# Altium PCB SIM5320  RPi BB.PcbDoc
Units mm, origin at the board's own origin, x right, y up, seen from the top; angles counter-clockwise.
Board outline 65.91 x 59.94 mm, 2 copper layers (Top Layer, Bottom Layer); 30 components, 44 nets, 190 pads, 24 vias.
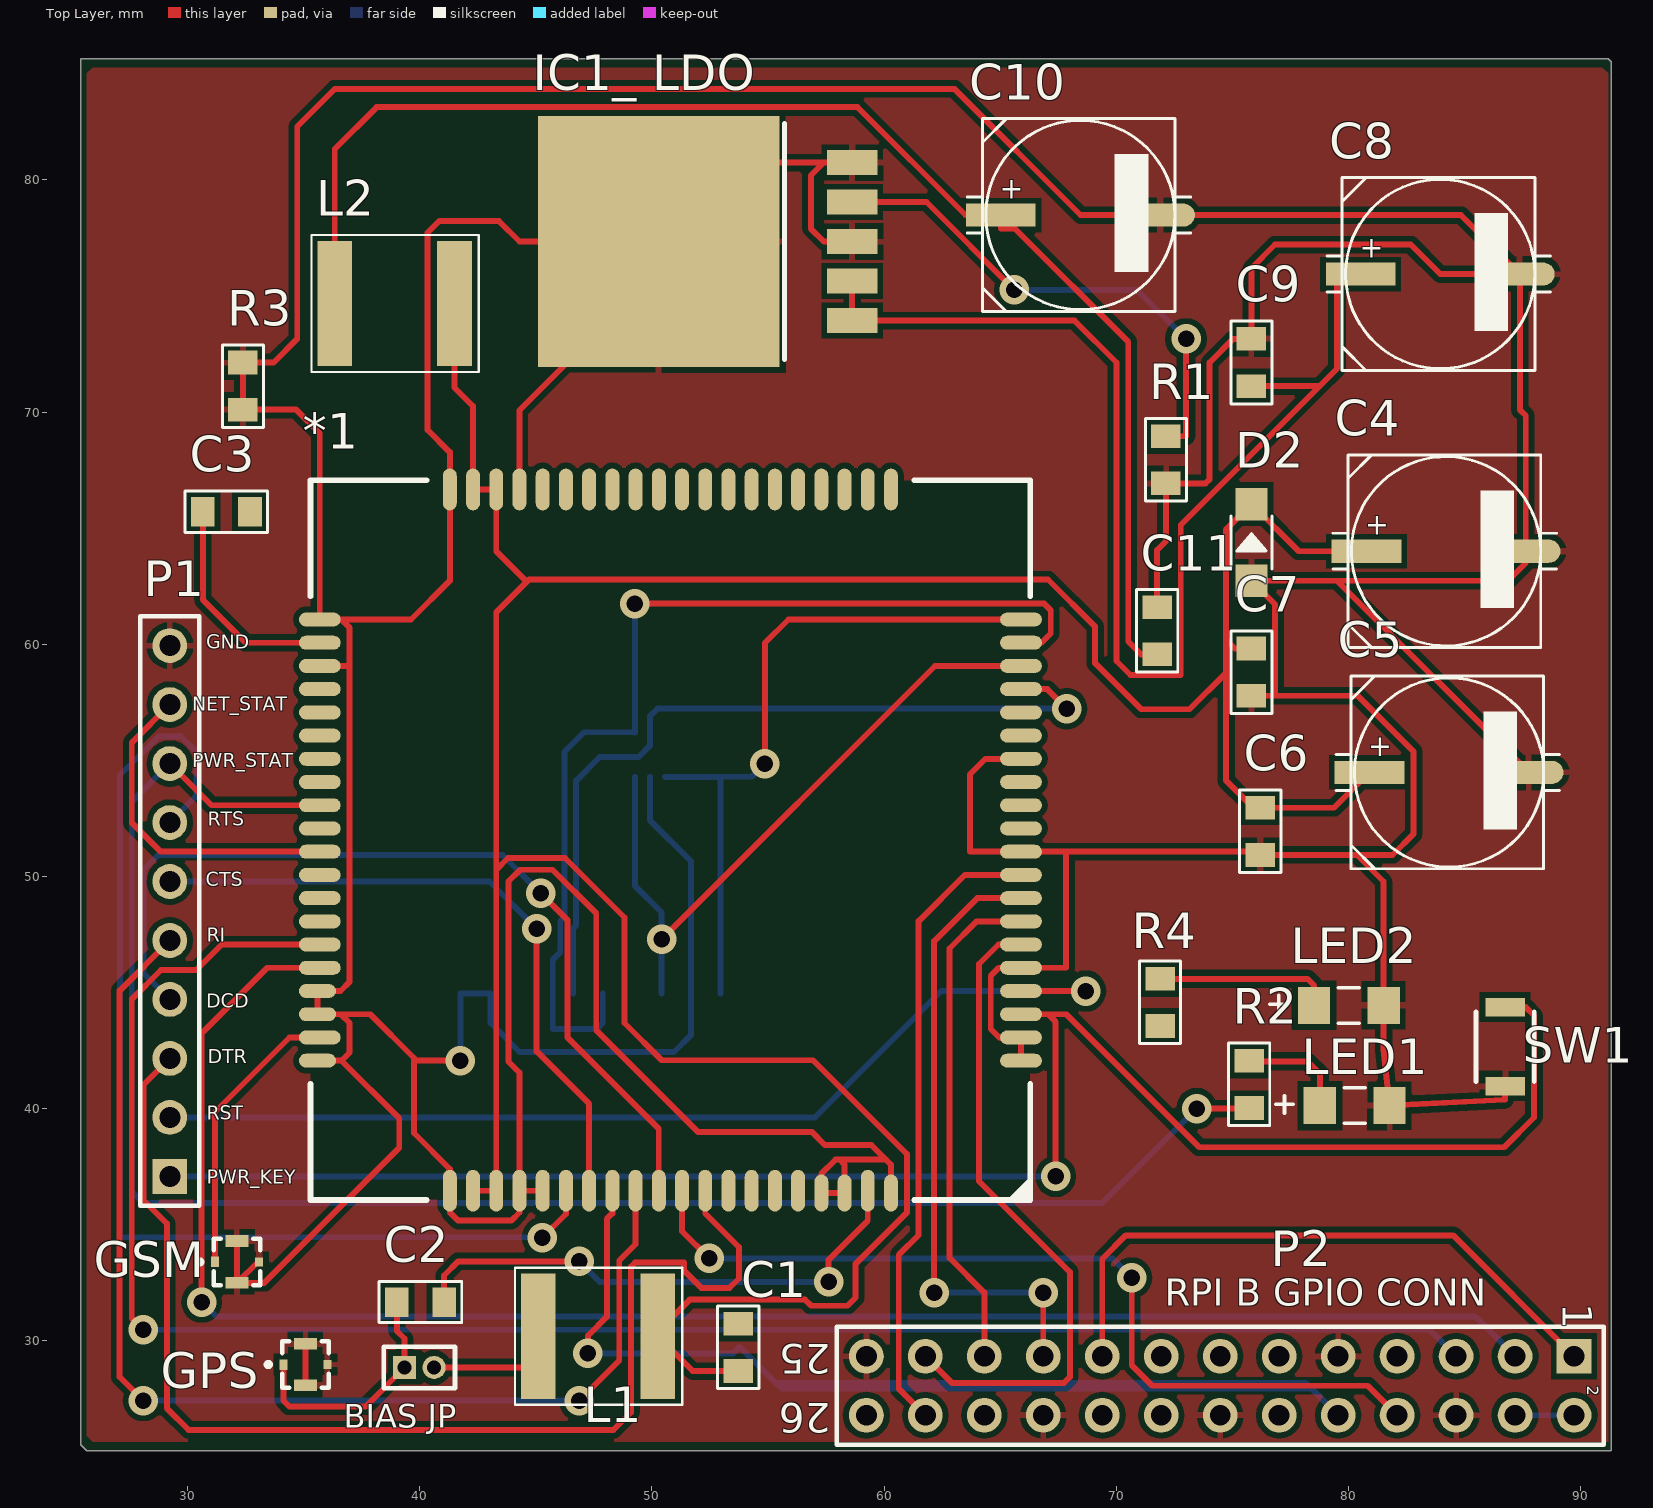
[diagram p0: Top Layer view]
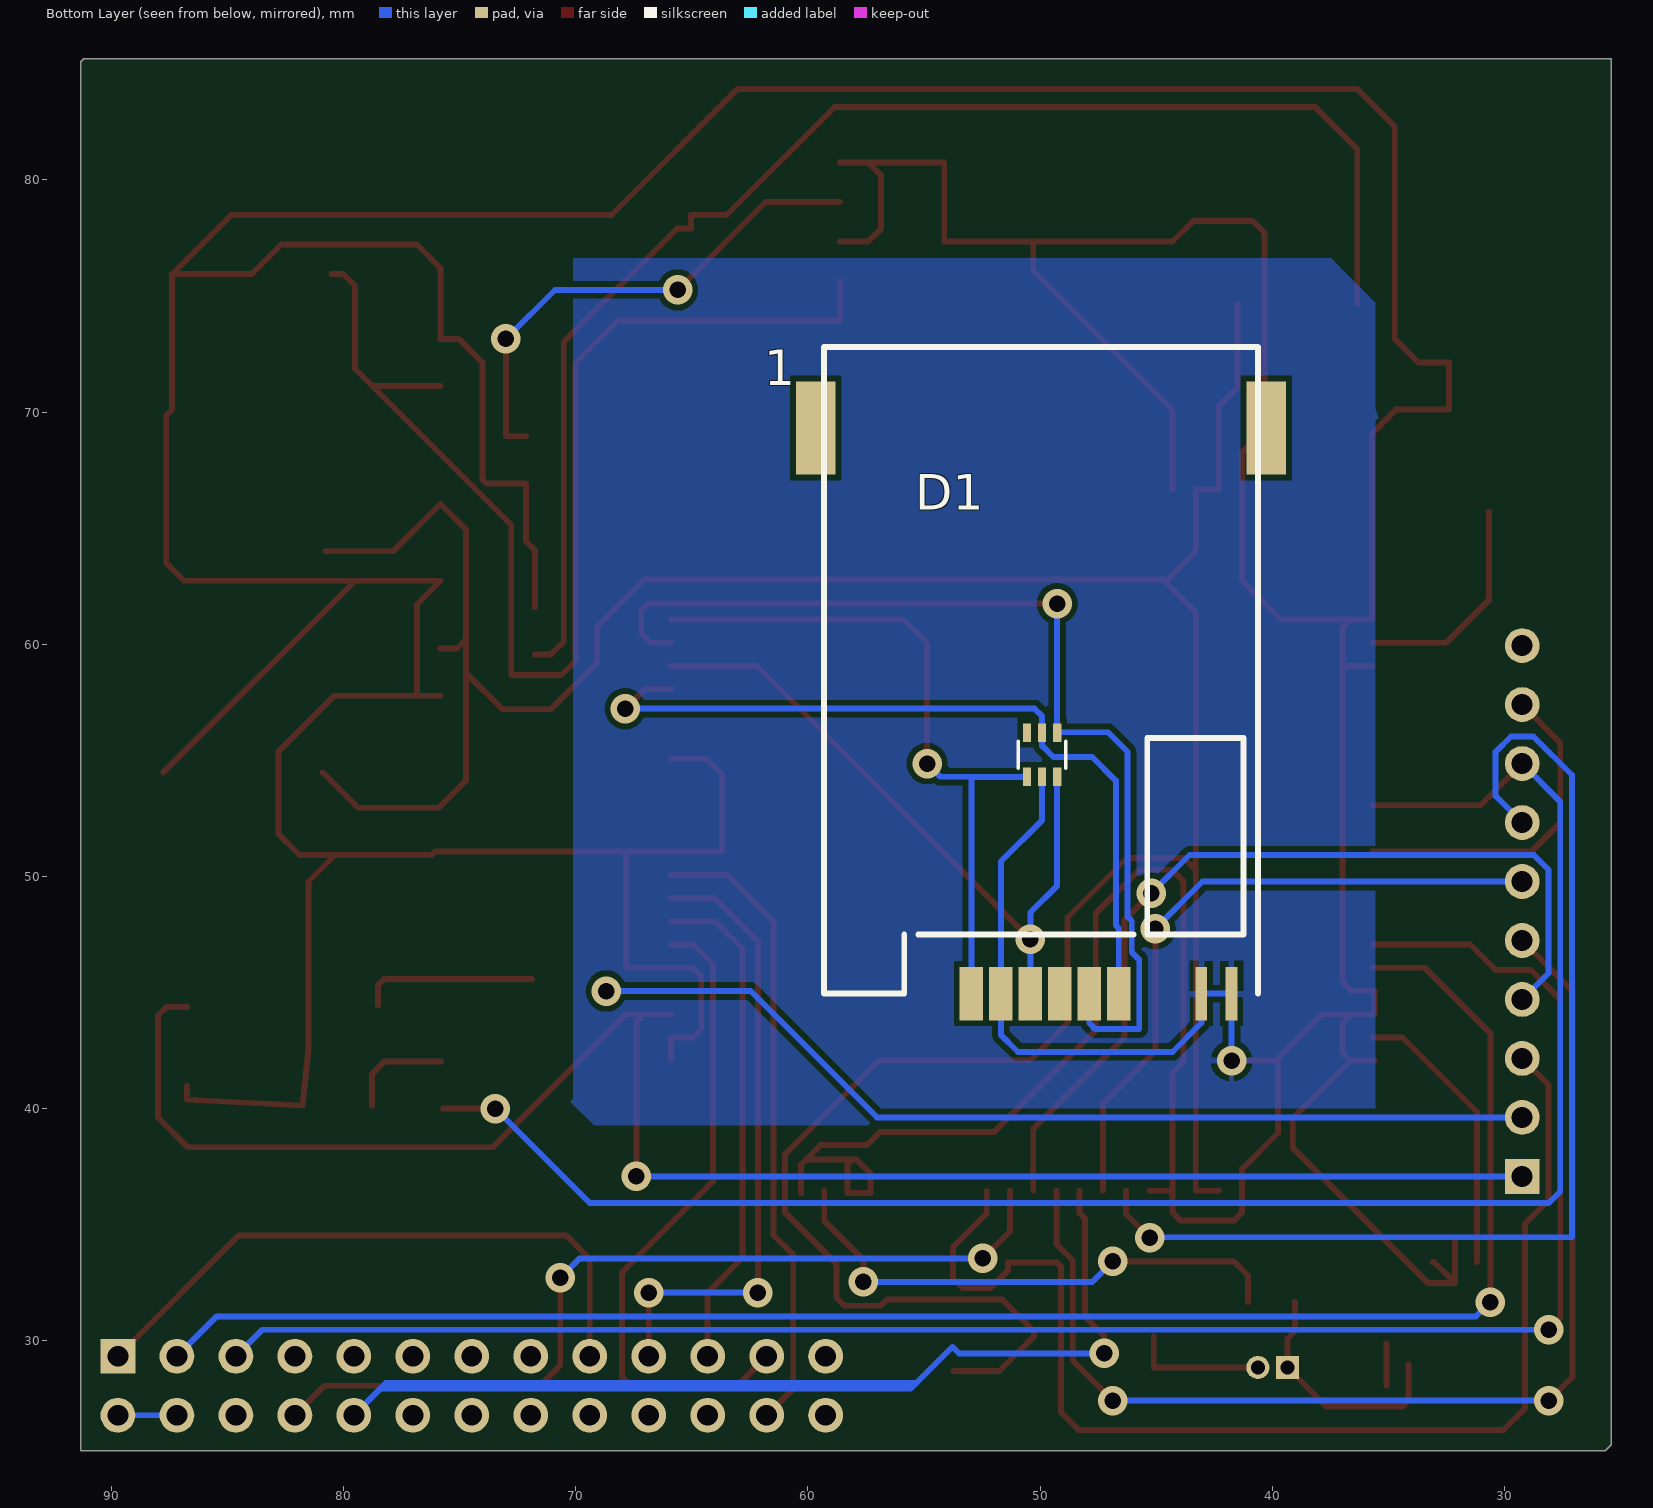
[diagram p1: Bottom Layer view, seen from below]

## Layer stack, top to bottom
Top Solder: solder mask 0.0102, Solder Resist, Dk 3.5
Top Layer: signal copper 0.0356
Dielectric 1: dielectric 0.32, FR-4, Dk 4.8
Bottom Layer: signal copper 0.0356
Bottom Solder: solder mask 0.0102, Solder Resist, Dk 3.5

## Board outline
25.4,85.217 91.186,85.217 91.313,85.09 91.313,25.273 25.654,25.273 25.527,25.4 25.4,25.527 25.4,85.09

## Design rules (kind name [scope] priority, off if disabled: settings)
Clearance [All] p1: gap=0.254
PolygonConnect [All] p1: connectstyle=Relief reliefconductorwidth=0.254 reliefentries=4 polygonreliefangle="90 Angle" airgapwidth=0.254
RoutingVias [All] p1: holewidth=0.711 width=1.27 viastyle="Through Hole" minholewidth=0.711 minwidth=1.27 maxholewidth=0.711 maxwidth=1.27
SolderMaskExpansion [All] p1: expansion=0.102
Width [All] p1: maxlimit=0.254 minlimit=0.254 preferedwidth=0.254
30 further rules are at their usual default settings.

## Components (designator, comment, footprint, x,y, rotation, side; value= is the part's Value field where it differs from the comment)
1 "10103594-0001LF" POS-5 49.784,44.958 r0 bottom
*1 "SIM5320" SIM5320 66.294,36.068 r180 top
"BIAS JP" "MHDR1X2" MHDR1X2 39.345,28.854 r0 top
C1 "33pF" 0805C-TBD 53.721,28.956 r90 top
C2 "33pF" 0805C-TBD 39.268,31.674 r0 top
C3 "10uF" 0805C-GENERIC 30.912,65.71 r0 top
C4 "100uF" PANACAP-e-GENERIC 84.201,64.008 r0 top
C5 "100uF" PANACAP-e-GENERIC 84.328,54.483 r0 top
C6 "33pF" 0805C-TBD 76.2,52.705 r270 top
C7 "TBD" 0805C-TBD 75.819,59.563 r270 top
C8 "100uF" PANACAP-e-GENERIC 83.947,75.946 r0 top
C9 "1uF" 0805C-TBD 75.819,71.374 r90 top
C10 "330uF" PANACAP-e-GENERIC 68.453,78.486 r0 top
C11 "100nF" 0805C-TBD 71.755,59.817 r90 top
D1 "SMF05C" SC70-6 49.911,55.245 r180 bottom
D2 "SMD-DIODE-ZENER-15V-500MW(SOD-123)" SOD-123_SMD-DIODE-ZENER-15V-500MW(SOD-123)(Primary) 75.819,64.389 r90 top
GPS "MM8030-2610RJ3" MURATA_MM8030-2610RJ3 35.077,28.981 r0 top
GSM "MM8030-2610RJ3" MURATA_MM8030-2610RJ3 32.131,33.401 r0 top
"IC1_ LDO" "MIC29302WU" TO263-5 52.832,77.343 r90 top
L1 "33nH" 2220 47.752,30.201 r0 top
L2 "220 Ohm" 2220 38.989,74.676 r0 top
LED1 "597-3311-402F" LED_597-3311-402F 80.264,40.132 r180 top
LED2 "597-3311-402F" LED_597-3311-402F 80.01,44.45 r180 top
P1 "Header 10" HDR1X10 29.235,37.084 r90 top (schematic designator P?)
P2 "Header 13X2" HDR2X13 89.713,29.337 r180 top
R1 "100" 0805R-TBD 72.136,68.707 r270 top
R2 "5 Ohm" 0805R-TBD 75.717,40.284 r90 top
R3 "60" 0805R-TBD 32.385,70.358 r90 top
R4 "5 Ohm" 0805R-TBD 71.882,43.815 r90 top
SW1 "B3U-3100P-B" B3U 86.741,42.672 r90 top

## Footprints (in the part's own frame and the unit in brackets; to place one, negate y for a bottom-side part, rotate by r counter-clockwise, add the part's x,y. Pads: shape width x height; smd on the part's side, far side on the other; paste and mask are expansions set on the pad)
0805C-GENERIC [mil] "CAPACITOR 0805"
  rect 40x50 smd: 1(-10,0) 2(70,0)
  silkscreen extent -40,-35 100,35, body extent -11,-25 70,25, height 26
0805C-TBD [mil] "CAPACITOR 0805"
  rect 40x50 smd: 1(-10,0) 2(70,0)
  silkscreen extent -40,-35 100,35, body extent -11,-25 70,25, height 26
0805R-TBD [mil] "RESISTOR 0805 VALUE TO BE DETERMINED"
  rect 40x50 smd: 1(-10,0) 2(70,0)
  silkscreen extent -40,-35 100,35, body extent -11,-25 70,25, height 27
2220 [mm]
  rect 1.5x5.4 smd paste-25.4 mask-25.4: 1(-2.65,0) 2(2.5,0)
  silkscreen extent -3.65,-2.95 3.55,2.95
B3U [mm]
  rect 0.8x1.7 smd paste-25.4 mask-25.4: 1(-1.7,0) 2(1.7,0)
  silkscreen extent -1.5,-1.25 1.5,1.25
HDR1X10 [mm] "Connector; Header; 10 Position"
  rect 1.5x1.5 hole 0.9: 1(0,0)
  round 1.5 hole 0.9: 2(2.54,0) 3(5.08,0) 4(7.62,0) 5(10.16,0) 6(12.7,0) 7(15.24,0) 8(17.78,0) 9(20.32,0) 10(22.86,0)
  silkscreen extent -1.27,-1.27 24.13,1.27
HDR2X13 [mm] "Connector; Header; 13x2 Position"
  rect 1.5x1.5 hole 0.9: 1(0,0)
  round 1.5 hole 0.9: 2(0,2.54) 3(2.54,0) 4(2.54,2.54) 5(5.08,0) 6(5.08,2.54) 7(7.62,0) 8(7.62,2.54) 9(10.16,0) 10(10.16,2.54) 11(12.7,0) 12(12.7,2.54) 13(15.24,0) 14(15.24,2.54) 15(17.78,0) 16(17.78,2.54) 17(20.32,0) 18(20.32,2.54) 19(22.86,0) 20(22.86,2.54) 21(25.4,0) 22(25.4,2.54) 23(27.94,0) 24(27.94,2.54) 25(30.48,0) 26(30.48,2.54)
  silkscreen extent -1.27,-1.27 31.75,3.81
LED_597-3311-402F [mil]
  rect 55x63 smd paste-1000 mask-1000: 1(-59,0) 2(59,0)
  silkscreen extent -18,-30 134,30
MHDR1X2 [mm]
  rect 1x1 hole 0.6: 1(0,0)
  round 1 hole 0.6: 2(1.27,0)
  silkscreen extent -0.9,-0.9 2.17,0.9
MURATA_MM8030-2610RJ3 [mm]
  rect 0.35x0.45 smd paste-25.4 mask-25.4: 1(-0.95,0)
  rect 0.35x0.4 smd paste-25.4 mask-25.4: 2(0.95,0)
  rect 1x0.5 smd paste-25.4 mask-25.4: 3(0,0.9) 4(0,-0.9)
  silkscreen extent -1.7,-1 1,1
PANACAP-e-GENERIC [mm]
  rect 3x1 smd: +(-3.429,0)
  oval 3x1 smd: -(3.429,0)
  silkscreen extent -4.87,-4.15 4.75,4.15, body extent -4.63,-4.15 4.37,4.15, height 6.2
POS-5 [mm]
  rect 1x2.3 smd paste-25.4 mask-25.4: 1(3.175,0) 2(0.635,0) 3(-1.905,0) 5(1.905,0) 6(-0.635,0) 7(-3.175,0)
  rect 0.5x2.3 smd paste-25.4 mask-25.4: 4(-6.73,0) 8(-8.03,0)
  rect 1.7x4 smd paste-25.4 mask-25.4: SP1(-9.527,-24.35) SP2(9.873,-24.35)
  silkscreen extent -9.18,-27.85 9.52,0
SC70-6 [mm]
  rect 0.35x0.8 smd mask-25.4: 1(-0.65,-0.95) 2(0,-0.95) 3(0.65,-0.95) 4(0.65,0.95) 5(0,0.95) 6(-0.65,0.95)
  silkscreen extent -1.02,-0.59 1.02,0.59
SIM5320 [mm]
  oval 1.8x0.6 smd: 1(0.4,-6) 2(0.4,-7) 3(0.4,-8) 4(0.4,-9) 5(0.4,-10) 6(0.4,-11) 7(0.4,-12) 8(0.4,-13) 9(0.4,-14) 10(0.4,-15) 11(0.4,-16) 12(0.4,-17) 13(0.4,-18) 14(0.4,-19) 15(0.4,-20) 16(0.4,-21) 17(0.4,-22) 18(0.4,-23) 19(0.4,-24) 20(0.4,-25) 41(30.6,-25) 42(30.6,-24) 43(30.6,-23) 44(30.6,-22) 45(30.6,-21) 46(30.6,-20) 47(30.6,-19) 48(30.6,-18) 49(30.6,-17) 50(30.6,-16) 51(30.6,-15) 52(30.6,-14) 53(30.6,-13) 54(30.6,-12) 55(30.6,-11) 56(30.6,-10) 59(30.6,-7)
  oval 0.6x1.8 smd: 21(6,-30.6) 22(7,-30.6) 23(8,-30.6) 24(9,-30.6) 25(10,-30.6) 26(11,-30.6) 27(12,-30.6) 28(13,-30.6) 29(14,-30.6) 30(15,-30.6) 31(16,-30.6) 32(17,-30.6) 33(18,-30.6) 34(19,-30.6) 35(20,-30.6) 36(21,-30.6) 37(22,-30.6) 38(23,-30.6) 39(24,-30.6) 40(25,-30.6) 61(25,-0.4) 62(24,-0.4) 63(23,-0.4) 64(22,-0.4) 65(21,-0.4) 66(20,-0.4) 67(19,-0.4) 68(18,-0.4) 69(17,-0.4) 70(16,-0.4) 71(15,-0.4) 72(14,-0.4) 73(13,-0.4) 74(12,-0.4) 75(11,-0.4) 76(10,-0.4) 79(7,-0.4)
  oval 1.6x0.6 smd: 57(30.7,-9) 58(30.7,-8) 60(30.7,-6)
  oval 0.6x1.6 smd: 77(9,-0.3) 78(8,-0.3) 80(6,-0.3)
  Top Layer pour cut-out: 0,0 31,0 31,-31 0,-31
  silkscreen extent 0,-31 31,0, body extent 0.5,-30.4 30.5,-0.4, height 2.9
SOD-123_SMD-DIODE-ZENER-15V-500MW(SOD-123)(Primary) [mil]
  rect 55x55 smd paste-1000 mask-1000: +(65,0) -(-65,0)
  silkscreen extent -45,-35 45,35
TO263-5 [mil]
  rect 42x85 smd paste-1000 mask-1000: 1(-134,-228) 2(-67,-228) 3(0,-228) 4(67,-228) 5(134,-228)
  rect 425.2x409.84 smd paste-1000 mask-1000: 6(0,100)
  silkscreen extent -201,-113 201,-113

## Part data
1: "CONN SIM CARD PUSH-PUSH R/A SMD"
"BIAS JP": "Header, 2-Pin"
C1 C2 C6 C7 C9 C11: library part 0805C-TBD, "CAPACITOR 0805 CERAMIC VALUE TO BE DETERMINED"
C3: library part 0805C-10UF-16V-X5R-TDK, "CAPACITOR 0805 CERAMIC"
C4 C5 C8 C10: library part PANACAP-100UF-25V-FK, "GENERIC CAPACITOR POLARISED"
D1: "TVS DIODE 5VWM 12.5VC SC70-6"
D2: "DIODE ZENER 5.1V 500MW SOD123"
GPS GSM: "CONN UMC RECEPT SMD"
"IC1_ LDO": "IC REG LDO ADJ 3A TO263-5"
L1 L2: library part HF30ACC575032-T, "FERRITE BEAD 270 OHM 2220 1LN"
P1: "Header, 10-Pin"
P2: "Header, 13-Pin, Dual row"
R1 R2 R3 R4: library part 0805R-TBD, "RESISTOR 0805 VALUE TO BE DETERMINED"
SW1: library part B3U-3100, "SWITCH TACTILE SPST-NO 0.05A 12V"

## Via types
v1: diameter 1.27, hole 0.711, Top Layer to Bottom Layer, 24 vias

## Nets (pads, with @x,y where several pads share a name; then routed paths per layer and width w, separated by ;. In a path a pad name is that pad's centre, name@x,y a point inside that pad or via, vN(x,y) a via of type N, cw(c..) or ccw(c..) an arc to the next point about the centre after c; other vN are vias at no path point)
1.8V: 1.1 *1.20 D1.1 | length 32.9
  Top Layer w0.254: v1(54.864,54.864) 54.864,60.052 55.88,61.068 *1.20
  Bottom Layer w0.254: 1.1 52.959,54.28 50.576,54.28 D1.1 54.295,54.295 v1(54.864,54.864)
3V3_OUT: P2.1 P2.17 | length 27.1
  Top Layer w0.254: P2.17 69.393,33.528 70.409,34.544 84.506,34.544 P2.1
"9V DC": "IC1_ LDO.1" "IC1_ LDO.2" C8.+ C9.1 | length 53.4
  Top Layer w0.254: 58.623,75.641 58.623,73.939 68.199,73.939 70.002,72.136 70.002,59.284 70.612,58.674 72.771,58.674 72.771,65.138 78.753,71.12 ; C9.1 78.753,71.12 ; C8.+ 80.01,75.946 79.502,75.438 79.502,71.869 78.753,71.12
+5V: P2.2 P2.4 | length 2.5
  Bottom Layer w0.254: P2.4 P2.2
GND: 1.4 1.5 1.8 "IC1_ LDO.3" "IC1_ LDO.5" "IC1_ LDO.6" *1.1 *1.2 *1.5 *1.10 *1.14 *1.37 *1.40 *1.41 *1.43 *1.57 *1.58 *1.60 *1.61 *1.64 *1.65 *1.77 *1.78 *1.80 C4.- C5.- C6.2 C7.2 C8.- C9.2 C10.- C11.2 D1.2 D2.- GPS.2 GPS.3 GPS.4 GSM.2 GSM.3 GSM.4 LED1.1 LED2.1 P1.10 P2.6 P2.9 P2.14 P2.20 P2.25 R1.2 R3.1 R3.2 SW1.1 | length 417.7
  Top Layer w0.254: GSM.3 GSM.4 ; GSM.2 33.031,33.401 GSM.4 ; GPS.4 GPS.3 ; *1.60 36.632,42.068 ; *1.43 36.982,59.068 ; v1(41.754,42.068) 39.751,42.068 ; *1.37 44.294,70.075 50.292,76.073 50.292,77.343 ; *1.65 *1.64 ; 58.623,77.343 57.404,77.343 56.845,77.902 56.845,80.188 57.404,80.747 ; 58.623,80.747 57.404,80.747 ; *1.80 60.294,37.592 60.074,37.812 ; *1.1 *1.2 64.958,43.068 64.592,43.434 64.592,45.72 64.94,46.068 *1.5 67.836,46.068 67.836,50.996 67.763,51.068 ; *1.14 64.364,55.068 63.689,54.393 63.689,51.068 *1.10 67.763,51.068 ; C11.2 71.755,64.059 72.136,64.44 R1.2 73.838,66.929 74.016,67.107 74.016,72.136 75.032,73.152 C9.2 75.819,76.2 76.835,77.216 82.677,77.216 83.947,75.946 C8.- ; C7.2 76.835,57.785 ; SW1.1 86.741,40.386 LED1.1 81.509,42.545 LED2.1 81.509,49.784 80.366,50.927 ; C5.- 79.502,62.738 ; GSM.4 33.303,32.501 39.116,38.314 39.116,39.584 36.632,42.068 ; 36.602,44.068 *1.58 *1.57 36.584,45.068 36.982,45.466 36.982,59.068 ; 36.602,44.068 37.866,44.068 39.751,42.183 39.751,42.068 ; 36.602,44.068 36.982,43.688 36.982,42.418 36.632,42.068 ; 36.62,61.068 *1.41 35.694,69.088 34.678,70.104 R3.1 R3.2 33.706,72.136 34.722,73.152 34.722,82.296 36.347,83.922 63.017,83.922 68.453,78.486 C10.- 84.836,78.486 C8.- ; 36.62,61.068 36.982,60.706 36.982,59.068 ; 36.62,61.068 39.624,61.068 41.294,62.738 *1.40 41.294,68.275 40.335,69.234 40.335,77.724 40.843,78.232 43.405,78.232 44.294,77.343 50.292,77.343 ; 39.751,42.068 39.751,38.949 41.294,37.406 *1.61 41.294,35.541 41.656,35.179 43.942,35.179 44.294,35.531 *1.64 ; *1.64 44.294,41.554 43.815,42.033 43.815,49.784 44.323,50.292 45.72,50.292 47.6,48.412 47.6,43.383 51.994,38.989 56.897,38.989 57.456,38.43 59.456,38.43 60.074,37.812 ; 50.292,77.343 54.127,77.343 54.127,80.747 57.404,80.747 ; 58.074,37.812 57.912,37.812 57.294,37.194 *1.77 *1.78 58.294,37.592 58.074,37.812 ; 58.074,37.812 60.074,37.812 ; 67.763,51.068 76.059,51.068 C6.2 80.366,50.927 ; 76.835,57.785 80.391,57.785 82.804,55.372 82.804,51.841 81.89,50.927 80.366,50.927 ; 76.835,57.785 76.835,61.722 D2.- 79.502,62.738 ; 79.502,62.738 86.868,62.738 87.63,63.5 C4.- 87.63,69.85 87.376,70.104 C8.-
  Bottom Layer w0.254: v1(41.754,42.068) 1.8 1.4 43.054,43.688 44.299,42.443 50.952,42.443 51.689,43.18 1.5 51.689,50.648 49.911,52.426 D1.2
GP_CLK0: P2.7
GPIO7: P2.26
GPIO17: P2.11
GPIO22: P2.15
GPIO23: P2.16
GPIO24: P2.18
GPIO25: P2.22
GPIO27: P2.13
GSM_ANT: *1.59 GSM.1 | length 12.3
  Top Layer w0.254: GSM.1 31.181,39.857 34.392,43.068 *1.59
I2C_SCL: *1.55 P2.5 | length 80.5
  Top Layer w0.254: v1(28.092,30.48) 27.596,30.976 27.596,44.716 28.854,45.974 30.378,45.974 31.472,47.068 *1.55
  Bottom Layer w0.254: v1(28.092,30.48) 45.725,30.48 48.055,30.48 83.49,30.48 P2.5
I2C_SDA: *1.56 P2.3 | length 75.4
  Top Layer w0.254: v1(30.607,31.674) 30.607,43.249 33.426,46.068 *1.56
  Bottom Layer w0.254: v1(30.607,31.674) 30.995,31.286 31.222,31.059 48.492,31.059 85.451,31.059 P2.3
Net*1_79: *1.79 C2.2 | length 23
  Top Layer w0.254: C2.2 41.046,32.817 41.656,33.426 v1(46.863,33.426) ; v1(57.607,32.537) 57.607,33.492 59.294,35.179 *1.79
  Bottom Layer w0.254: v1(46.863,33.426) 47.752,32.537 v1(57.607,32.537)
NET_STAT: *1.51 P1.9 | length 14.4
  Top Layer w0.254: P1.9 27.596,55.765 27.596,52.312 28.84,51.068 *1.51
"NetBIAS JP_1": "BIAS JP.1" C2.1 GPS.1 | length 10.5
  Top Layer w0.254: GPS.1 34.127,27.432 34.381,27.178 37.668,27.178 39.345,28.854 39.345,30.099 39.014,30.429 C2.1
"NetBIAS JP_2": "BIAS JP.2" L1.1 | length 5.8
  Top Layer w0.254: 40.615,28.854 45.102,28.854 L1.1
NetC10_+: C10.+ C11.1 L2.1 | length 60.5
  Top Layer w0.254: L2.1 36.339,81.331 38.142,83.134 58.852,83.134 63.5,78.486 C10.+ 65.024,77.902 65.634,77.902 70.51,73.025 70.51,60.122 71.069,59.563 C11.1
"NetIC1_ LDO_4": "IC1_ LDO.4" R1.1 | length 21.9
  Top Layer w0.254: 58.623,79.045 61.824,79.045 v1(65.608,75.26) ; R1.1 73,68.961 v1(73,73.152)
  Bottom Layer w0.254: v1(65.608,75.26) 70.891,75.26 v1(73,73.152)
NetLED1_2: LED1.2 R2.2 | length 4.6
  Top Layer w0.254: R2.2@75.794,42.037 78.232,42.037 78.765,41.504 LED1.2
NetLED2_2: LED2.2 R4.2 | length 7.6
  Top Layer w0.254: R4.2 78.232,45.593 78.511,45.314 LED2.2
PWM: P2.12
PWR_KEY: *1.3 P1.1 SW1.2 | length 76.1
  Top Layer w0.254: *1.3 67.056,44.068 ; v1(67.386,37.084) 67.386,43.738 67.056,44.068 ; SW1.2 87.63,44.372 87.986,44.016 87.986,39.624 86.701,38.34 73.573,38.34 67.844,44.068 67.056,44.068
  Bottom Layer w0.254: P1.1 v1(67.386,37.084)
PWR_STAT: *1.49 P1.8 R2.1 | length 76.3
  Top Layer w0.254: P1.8 31.031,53.068 *1.49 ; v1(73.457,40.005) R2.1@75.717,40.005
  Bottom Layer w0.254: P1.8 27.596,53.225 27.596,36.437 28.092,35.941 69.393,35.941 v1(73.457,40.005)
RST: *1.4 P1.2 | length 44.5
  Top Layer w0.254: *1.4 v1(68.682,45.068)
  Bottom Layer w0.254: P1.2 57.015,39.624 62.459,45.068 v1(68.682,45.068)
SIM_CLK: 1.3 *1.19 D1.4 | length 45.1
  Top Layer w0.254: v1(49.261,61.749) 66.894,61.749 67.175,61.468 67.175,60.466 66.777,60.068 *1.19
  Bottom Layer w0.254: 1.3 47.879,43.688 47.618,43.427 45.728,43.427 45.728,46.414 46.05,46.736 46.05,48.082 46.228,48.26 46.228,55.364 47.074,56.21 D1.4@49.261,56.21 ; D1.4 D1.4@49.261,56.21 ; v1(49.261,61.749) D1.4@49.261,56.21
SIM_DAT: 1.7 *1.17 D1.5 | length 34.7
  Top Layer w0.254: *1.17 67.027,58.068 v1(67.869,57.226)
  Bottom Layer w0.254: 1.7 46.609,47.777 46.736,47.904 46.736,54.127 47.752,55.143 49.428,55.143 49.911,55.626 D1.5 49.911,56.896 50.241,57.226 v1(67.869,57.226)
SIM_RST: 1.2 *1.18 D1.3 | length 30.2
  Top Layer w0.254: v1(50.419,47.295) 62.192,59.068 *1.18
  Bottom Layer w0.254: D1.3 49.261,49.606 50.419,48.448 v1(50.419,47.295) 1.2
SPI_CLK: *1.6 P2.23 | length 28.4
  Top Layer w0.254: P2.23 62.916,28.194 67.742,28.194 67.996,28.448 67.996,32.969 64.084,36.881 64.084,46.228 64.924,47.068 *1.6
SPI_CS: *1.9 P2.24 | length 27.3
  Top Layer w0.254: P2.24 60.63,27.94 60.63,33.706 61.483,34.559 61.483,48.076 63.475,50.068 *1.9
SPI_MISO: *1.7 P2.21 | length 21.7
  Top Layer w0.254: P2.21 64.313,32.079 62.814,33.577 62.814,46.9 63.983,48.068 *1.7
SPI_MOSI: *1.8 P2.19 | length 27.1
  Top Layer w0.254: v1(62.154,32.08) 62.154,47.214 64.008,49.068 *1.8 ; P2.19 v1(66.853,32.08)
  Bottom Layer w0.254: v1(62.154,32.08) v1(66.853,32.08)
UART_CTS: *1.67 P1.6 | length 28.9
  Top Layer w0.254: v1(45.034,47.752) 45.034,42.469 47.294,40.209 *1.67
  Bottom Layer w0.254: P1.6 43.002,49.784 v1(45.034,47.752)
UART_DCD: *1.70 P1.4 | length 39
  Top Layer w0.254: v1(45.212,49.276) 46.355,48.133 46.355,43.078 50.294,39.139 *1.70
  Bottom Layer w0.254: P1.4 28.104,45.835 28.104,50.292 28.739,50.927 43.561,50.927 v1(45.212,49.276)
UART_DTR: *1.72 P1.3 | length 52.8
  Top Layer w0.254: P1.3 28.104,41.033 28.104,36.056 29.108,35.052 29.108,27.102 30.048,26.162 48.336,26.162 49.098,26.924 49.098,33.198 49.276,33.376 51.384,33.376 51.384,33.02 52.121,32.283 53.34,32.283 53.746,32.69 53.746,34.036 52.294,35.488 *1.72
UART_RI: *1.69 P1.5 | length 49.9
  Top Layer w0.254: v1(28.092,27.432) 27.076,28.448 27.076,45.085 P1.5 ; v1(46.863,27.432) 48.59,29.159 48.59,33.459 49.294,34.163 *1.69
  Bottom Layer w0.254: v1(28.092,27.432) 44.679,27.432 v1(46.863,27.432)
UART_RTS: *1.66 P1.7 | length 48.3
  Top Layer w0.254: v1(45.278,34.451) 46.294,35.467 *1.66
  Bottom Layer w0.254: P1.7 30.378,53.467 30.378,55.372 29.718,56.032 28.753,56.032 27.088,54.368 27.088,34.481 v1(45.278,34.451)
UART_RXD: *1.68 P2.10 | length 64.3
  Top Layer w0.254: v1(47.244,29.464) 47.244,30.226 48.057,31.039 48.057,35.255 48.294,35.492 *1.68
  Bottom Layer w0.254: v1(47.244,29.464) 53.492,29.464 53.772,29.743 55.321,28.194 ; P2.10 78.41,27.94 ; 55.321,28.194 55.575,27.94 78.41,27.94 ; 55.321,28.194 78.156,28.194 78.41,27.94
UART_TXD: *1.71 P2.8 | length 38
  Top Layer w0.254: *1.71 51.294,34.722 v1(52.462,33.553) ; v1(70.663,32.715) 70.663,28.956 71.552,28.067 80.823,28.067 P2.8
  Bottom Layer w0.254: v1(52.462,33.553) 69.825,33.553 v1(70.663,32.715)
VBAT: *1.38 *1.39 *1.62 *1.63 C1.1 C4.+ C5.+ C6.1 C7.1 D2.+ L1.2 L2.2 | length 148.9
  Top Layer w0.254: L2.2 41.489,71.061 42.294,70.256 *1.39 *1.38 43.294,64.008 44.609,62.693 ; *1.62 *1.63 43.294,50.292 ; C1.1 51.751,28.702 L1.2 50.252,30.404 51.624,31.775 56.59,31.775 56.854,31.511 58.42,31.511 58.773,31.865 58.773,33.323 60.975,35.524 60.975,38.049 56.936,42.088 50.419,42.088 48.819,43.688 48.819,48.235 46.253,50.8 43.802,50.8 43.294,50.292 ; C7.1 75.108,59.817 74.727,60.198 ; C4.+ 77.851,64.008 D2.+ 74.727,64.948 74.727,60.198 ; C5.+ 79.375,52.959 C6.1 75.895,52.959 74.727,54.127 74.727,58.776 ; 43.294,50.292 43.294,61.379 44.609,62.693 ; 44.609,62.693 44.704,62.789 67.056,62.789 69.088,60.757 69.088,59.182 71.069,57.201 73.152,57.201 74.727,58.776 ; 74.727,58.776 74.727,60.198
VRTC: *1.42 C3.1 | length 9.6
  Top Layer w0.254: C3.1 30.658,61.922 32.512,60.068 *1.42
pads on no net: 1.6 1.SP1 1.SP2 *1.11 *1.12 *1.13 *1.15 *1.16 *1.21 *1.22 *1.23 *1.24 *1.25 *1.26 *1.27 *1.28 *1.29 *1.30 *1.31 *1.32 *1.33 *1.34 *1.35 *1.36 *1.44 *1.45 *1.46 *1.47 *1.48 *1.50 *1.52 *1.53 *1.54 *1.73 *1.74 *1.75 *1.76 C1.2 C3.2 D1.6 R4.1

## Polygon pours and split planes (outlines as drawn)
GND on Top Layer "GND Plane" (solid, remove dead copper, pour order 0): 25.781,84.709 25.908,84.836 90.932,84.836 91.186,84.582 91.186,25.654 25.908,25.654 25.781,25.781 25.654,25.908 25.654,84.582
GND on Bottom Layer "GND Plane" (solid, remove dead copper, pour order 2): 35.554,70.138 35.554,74.71 36.697,75.853 37.459,76.615 70.098,76.615 70.098,40.42 70.225,40.293 69.209,39.277 35.554,39.277 35.554,69.63 35.427,69.757

## Silkscreen, mask and mechanical layers (free items; w line width, h text height)
Top Overlay:
  text "GND" at 30.81,59.614 h1.02
  text "NET_STAT" at 30.201,56.947 h1.02
  text "PWR_STAT" at 30.201,54.508 h1.02
  text "RTS" at 30.861,51.994 h1.02
  text "CTS" at 30.785,49.378 h1.02
  text "RI" at 30.836,46.99 h1.02
  text "DCD" at 30.81,44.145 h1.02
  text "DTR" at 30.861,41.758 h1.02
  text "RST" at 30.836,39.319 h1.02
  text "PWR_KEY" at 30.836,36.576 h1.02
  text "RPI B GPIO CONN" at 72.085,31.115 h2

## Text inside footprints (layer, text, board x,y; h text height)
C4: Top Overlay "+" at 80.726,64.708 h0.89
C5: Top Overlay "+" at 80.853,55.183 h0.89
C8: Top Overlay "+" at 80.472,76.646 h0.89
C10: Top Overlay "+" at 64.978,79.186 h0.89
P2: Top Overlay "26" at 57.709,27.305 h1.27 r180; Top Overlay "25" at 57.709,29.845 h1.27 r180; Top Overlay "1" at 89.23,31.623 h1.27 r270; Top Overlay "2" at 90.272,28.067 h0.5 r270